# Altium PCB DZ_PCB.PcbDoc
Units mm, origin at the board's own origin, x right, y up, seen from the top; angles counter-clockwise.
Board outline 110 x 50 mm, 2 copper layers (Top Layer, Bottom Layer), stack 2 mm thick; 35 components, 17 nets, 226 pads, 74 vias.
Unrouted connection lines stored in the file: 1.
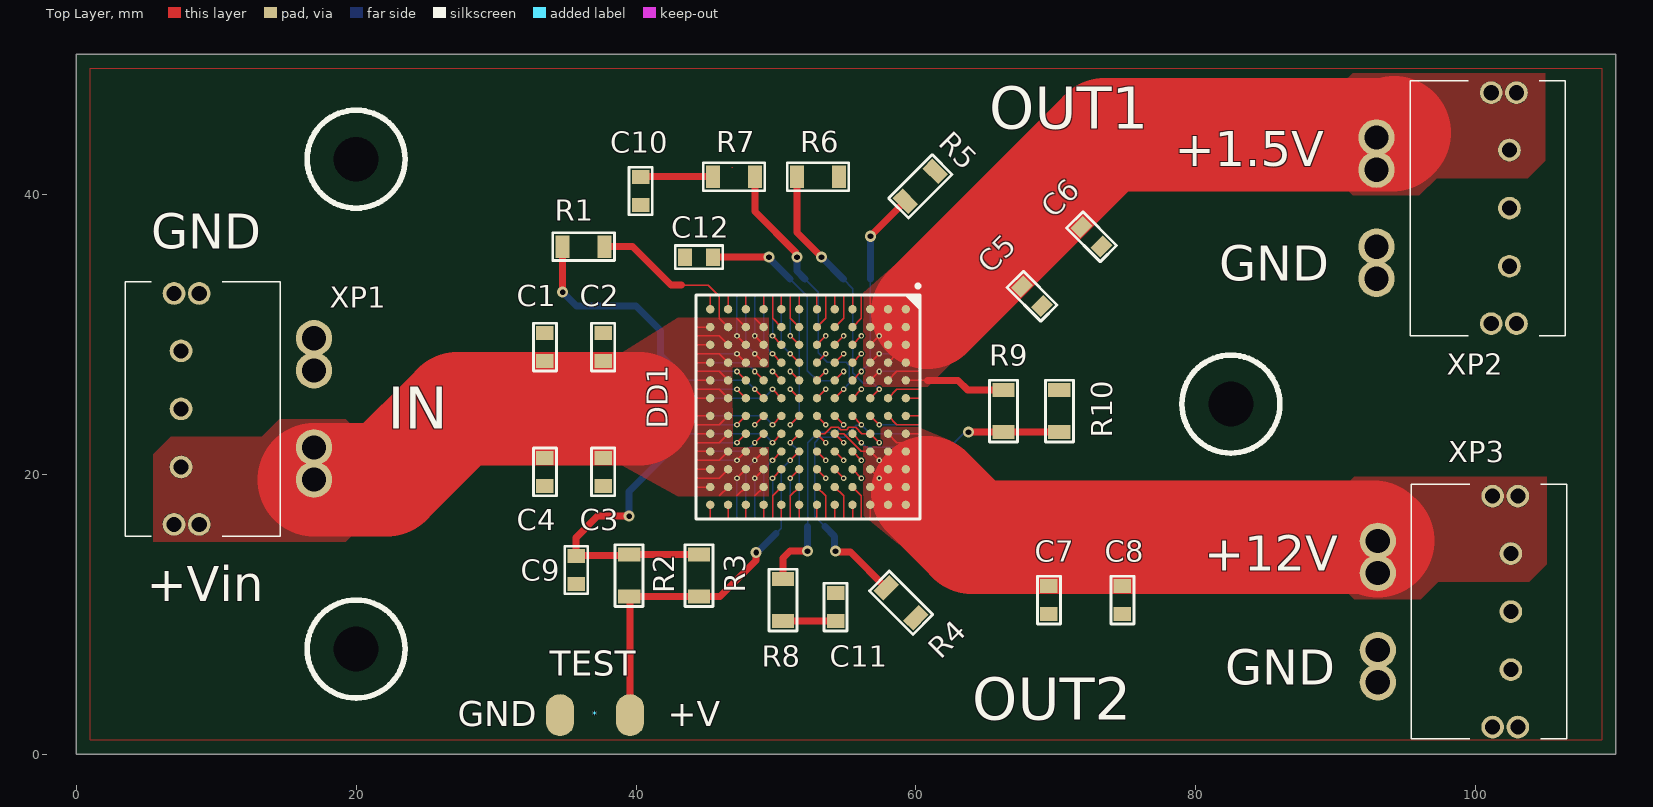
[diagram p0: Top Layer view]
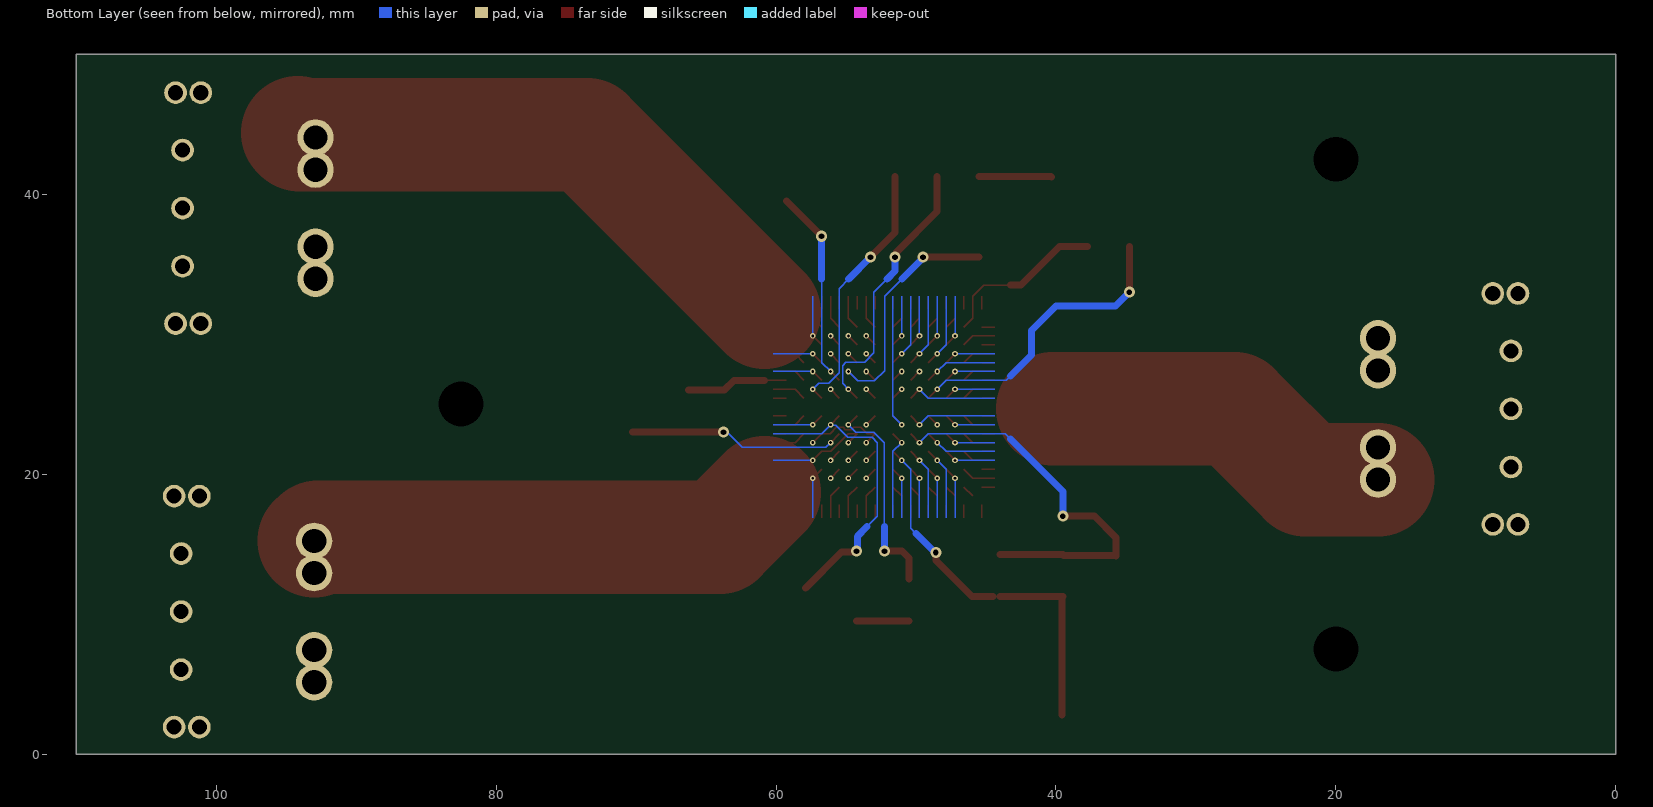
[diagram p1: Bottom Layer view, seen from below]

## Layer stack, top to bottom
Top Solder: solder mask 0.0102, Solder Resist, Dk 3.5
Top Layer: signal copper 0.7
Dielectric 1: dielectric 0.6, FR-4, Dk 4.8
Bottom Layer: signal copper 0.7
Bottom Solder: solder mask 0.0102, Solder Resist, Dk 3.5

## Board outline
0,0 110,0 110,50 0,50

## Design rules (kind name [scope] priority, off if disabled: settings)
Clearance Clearance_BGA_Fanout [WithinRoom('BGA_Fanout')] p1: gap=0.1 ignorepadtopadclearanceinfootprint=FALSE except(0.05: Fill-Fill Fill-Poly Fill-Region Poly-Poly Poly-Region Region-Region)
Clearance [All] p2: gap=0.254 ignorepadtopadclearanceinfootprint=FALSE except(0: Arc-Hole Track-Hole SMDPad-Hole THPad-Hole Via-Hole Fill-Hole Poly-Hole Region-Hole Text-Hole; 0.5: Fill-Fill Fill-Poly Fill-Region Poly-Poly Poly-Region Region-Region)
FanoutControl Fanout_BGA [IsBGA] p1: bgadir=Out bgaviamode=Centered fanoutstyle=BGA fanoutdirection=Alternating viagrid=0.025 // Fanout_BGA (Default Rule)
PolygonConnect [All] p1: connectstyle=Relief reliefconductorwidth=0.254 reliefentries=4 polygonreliefangle="90 Angle" airgapwidth=0
RoomDefinition BGA_Fanout [InComponentClass('Room Definition 1')] p1: confinementstyle=ConfineIn formatcopy=TRUE lockcomponents=FALSE outline 43.761,33.944 60.819,33.944 60.819,16.261 43.761,16.261
RoutingVias RoutingVias_BGA_Fanout [WithinRoom('BGA_Fanout')] p1: holewidth=0.2 width=0.4 viastyle="Through Hole" minholewidth=0.2 minwidth=0.4 maxholewidth=0.2 maxwidth=0.4
RoutingVias [All] p2: holewidth=0.4 width=0.8 viastyle="Through Hole" minholewidth=0.4 minwidth=0.8 maxholewidth=0.4 maxwidth=0.8
SolderMaskExpansion [All] p1: expansion=0.102 istentingtop=FALSE
Width Width_BGA_Fanout [WithinRoom('BGA_Fanout')] p1: maxlimit=0.1 minlimit=0.1 preferedwidth=0.1 minimp=50.000000 maximp=50.000000 favimp=50.000000
Width [All] p2: maxlimit=8.1 minlimit=0.1 preferedwidth=0.5 minimp=50.000000 maximp=50.000000 favimp=50.000000
29 further rules are at their usual default settings.

## Classes and differential pairs
component class DZ_Scheme: * C1 C2 C3 C4 C5 C6 C7 C8 C9 C10 C11 C12 DD1 R1 R2 R3 R4 R5 R6 R7 R8 R9 R10 XP1 XP2 XP3

## Components (designator, comment, footprint, x,y, rotation, side; value= is the part's Value field where it differs from the comment)
* "1982295-1" TEST_ZONE 37.075,2.775 r0 top
C1 "Capasitor" "CAP: 0805" 33.489,29.075 r270 top
C2 "Capasitor" "CAP: 0805" 37.649,29.075 r270 top
C3 "Capasitor" "CAP: 0805" 37.649,20.157 r90 top
C4 "Capasitor" "CAP: 0805" 33.489,20.157 r90 top
C5 "Capasitor" "CAP: 0805" 68.293,32.707 r135 top
C6 "Capasitor" "CAP: 0805" 72.543,36.957 r315 top
C7 "Capasitor" "CAP: 0805" 69.5,11 r90 top
C8 "Capasitor" "CAP: 0805" 74.75,11 r270 top
C9 "Capasitor" "CAP: 0805" 35.725,13.15 r90 top
C10 "Capasitor" "CAP: 0805" 40.325,40.227 r90 top
C11 "Capasitor" "CAP: 0805" 54.25,10.5 r90 top
C12 "Capasitor" "CAP: 0805" 44.5,35.5 r0 top
DD1 "LTM4630-1" BGA144C127P12X12_1600X1600X501 52.29,24.79 r270 top
Designator1 "Comment" "BOASVIEWdrill:Таблица отверстий:0:0:0:0" 50.5,2305.25 r0 top
Designator1 "Comment" "BOASVIEWside:Вид платы сверху:1:0:0:0" 66,2419 r0 top
Designator1 "Comment" "BOASVIEWassboky:Вид сбоку для сборочного чертежа:1:0:0:101" 482,2398.25 r0 top
Designator1 "Comment" "BOASVIEWlayer:Bottom Layer:1:-1:32:1" 66.25,2379.75 r0 top
Designator1 "Comment" "BOASVIEWlayer:Top Layer:1:1:1:1" 66,2447.5 r0 top
Designator1 "Comment" "BOASVIEWlayer:Top Overlay:1:1:33:2" 253,2449.5 r0 top
Designator1 "Comment" "BOASVIEWassembly:Вид сверху для сборочного:1:1:0:101" 480.5,2447.5 r0 top
Designator1 "Comment" "BOASVIEWassembly:Вид снизу для сборочного:1:-1:0:101" 484,2349.25 r0 top
R1 "Resistor" "RES: 1206" 36.25,36.25 r0 top
R2 "Resistor" "RES: 1206" 39.5,12.75 r270 top
R3 "Resistor" "RES: 1206" 44.5,12.75 r270 top
R4 "Resistor" "RES: 1206" 58.939,10.811 r135 top
R5 "Resistor" "RES: 1206" 60.311,40.561 r225 top
R6 "Resistor" "RES: 1206" 53,41.25 r0 top
R7 "Resistor" "RES: 1206" 47,41.25 r180 top
R8 "Resistor" "RES: 1206" 50.5,11 r270 top
R9 "Resistor" "RES: 1206" 66.25,24.5 r270 top
R10 "Resistor" "RES: 1206" 70.25,24.5 r270 top
XP1 "1982295-1" 19822951 7.889,24.657 r90 top
XP2 "1982295-1" 19822951 102,39 r270 top
XP3 "1982295-1" 19822951 102.1,10.176 r270 top

## Footprints (in the part's own frame and the unit in brackets; to place one, negate y for a bottom-side part, rotate by r counter-clockwise, add the part's x,y. Pads: shape width x height; smd on the part's side, far side on the other; paste and mask are expansions set on the pad)
19822951 [mm]
  round 1.62 hole 1.08: 0(0,0.4) 1(-8.25,-0.9) 1(-8.25,0.9) 1(-4.15,0.4) 2(4.15,0.4) 2(8.25,-0.9) 2(8.25,0.9)
  round 2.599 hole 1.733: 1(-5.05,-9.1) 1(-2.75,-9.1) 2(2.75,-9.1) 2(5.05,-9.1)
  silkscreen extent -9.1,-6.7 9.1,4.4, body extent -9.1,-9.53 9.1,4.27, height 7.91
BGA144C127P12X12_1600X1600X501 [mm] "BGA, 144-Leads, Body 16,00x16,00mmx5,01mm, Pitch 1,27mm"
  round 0.6 smd: A1(-6.985,6.985) A2(-5.715,6.985) A3(-4.445,6.985) A4(-3.175,6.985) A5(-1.905,6.985) A6(-0.635,6.985) A7(0.635,6.985) A8(1.905,6.985) A9(3.175,6.985) A10(4.445,6.985) A11(5.715,6.985) A12(6.985,6.985) B1(-6.985,5.715) B2(-5.715,5.715) B3(-4.445,5.715) B4(-3.175,5.715) B5(-1.905,5.715) B6(-0.635,5.715) B7(0.635,5.715) B8(1.905,5.715) B9(3.175,5.715) B10(4.445,5.715) B11(5.715,5.715) B12(6.985,5.715) C1(-6.985,4.445) C2(-5.715,4.445) C3(-4.445,4.445) C4(-3.175,4.445) C5(-1.905,4.445) C6(-0.635,4.445) C7(0.635,4.445) C8(1.905,4.445) C9(3.175,4.445) C10(4.445,4.445) C11(5.715,4.445) C12(6.985,4.445) D1(-6.985,3.175) D2(-5.715,3.175) D3(-4.445,3.175) D4(-3.175,3.175) D5(-1.905,3.175) D6(-0.635,3.175) D7(0.635,3.175) D8(1.905,3.175) D9(3.175,3.175) D10(4.445,3.175) D11(5.715,3.175) D12(6.985,3.175) E1(-6.985,1.905) E2(-5.715,1.905) E3(-4.445,1.905) E4(-3.175,1.905) E5(-1.905,1.905) E6(-0.635,1.905) E7(0.635,1.905) E8(1.905,1.905) E9(3.175,1.905) E10(4.445,1.905) E11(5.715,1.905) E12(6.985,1.905) F1(-6.985,0.635) F2(-5.715,0.635) F3(-4.445,0.635) F4(-3.175,0.635) F5(-1.905,0.635) F6(-0.635,0.635) F7(0.635,0.635) F8(1.905,0.635) F9(3.175,0.635) F10(4.445,0.635) F11(5.715,0.635) F12(6.985,0.635) G1(-6.985,-0.635) G2(-5.715,-0.635) G3(-4.445,-0.635) G4(-3.175,-0.635) G5(-1.905,-0.635) G6(-0.635,-0.635) G7(0.635,-0.635) G8(1.905,-0.635) G9(3.175,-0.635) G10(4.445,-0.635) G11(5.715,-0.635) G12(6.985,-0.635) H1(-6.985,-1.905) H2(-5.715,-1.905) H3(-4.445,-1.905) H4(-3.175,-1.905) H5(-1.905,-1.905) H6(-0.635,-1.905) H7(0.635,-1.905) H8(1.905,-1.905) H9(3.175,-1.905) H10(4.445,-1.905) H11(5.715,-1.905) H12(6.985,-1.905) J1(-6.985,-3.175) J2(-5.715,-3.175) J3(-4.445,-3.175) J4(-3.175,-3.175) J5(-1.905,-3.175) J6(-0.635,-3.175) J7(0.635,-3.175) J8(1.905,-3.175) J9(3.175,-3.175) J10(4.445,-3.175) J11(5.715,-3.175) J12(6.985,-3.175) K1(-6.985,-4.445) K2(-5.715,-4.445) K3(-4.445,-4.445) K4(-3.175,-4.445) K5(-1.905,-4.445) K6(-0.635,-4.445) K7(0.635,-4.445) K8(1.905,-4.445) K9(3.175,-4.445) K10(4.445,-4.445) K11(5.715,-4.445) K12(6.985,-4.445) L1(-6.985,-5.715) L2(-5.715,-5.715) L3(-4.445,-5.715) L4(-3.175,-5.715) L5(-1.905,-5.715) L6(-0.635,-5.715) L7(0.635,-5.715) L8(1.905,-5.715) L9(3.175,-5.715) L10(4.445,-5.715) L11(5.715,-5.715) L12(6.985,-5.715) M1(-6.985,-6.985) M2(-5.715,-6.985) M3(-4.445,-6.985) M4(-3.175,-6.985) M5(-1.905,-6.985) M6(-0.635,-6.985) M7(0.635,-6.985) M8(1.905,-6.985) M9(3.175,-6.985) M10(4.445,-6.985) M11(5.715,-6.985) M12(6.985,-6.985)
  silkscreen extent -8.77,-8 8,8, body extent -8,-8 8,8, height 5.01
"BOASVIEWassboky:Вид сбоку для сборочного чертежа:1:0:0:101" [mm]
"BOASVIEWassembly:Вид сверху для сборочного:1:1:0:101" [mm]
"BOASVIEWassembly:Вид снизу для сборочного:1:-1:0:101" [mm]
"BOASVIEWdrill:Таблица отверстий:0:0:0:0" [mm]
"BOASVIEWlayer:Bottom Layer:1:-1:32:1" [mm]
"BOASVIEWlayer:Top Layer:1:1:1:1" [mm]
"BOASVIEWlayer:Top Overlay:1:1:33:2" [mm]
"BOASVIEWside:Вид платы сверху:1:0:0:0" [mm]
"CAP: 0805" [mm]
  rect 1x1.25 smd: 1(-1,0) 2(1,0)
  silkscreen extent -1.7,-0.82 1.7,0.82, body extent -1,-0.62 1,0.63, height 0.78
"RES: 1206" [mm]
  rect 1x1.6 smd: 1(-1.5,0) 2(1.5,0)
  silkscreen extent -2.2,-1 2.2,1, body extent -1.65,-0.8 1.55,0.8, height 0.47
TEST_ZONE [mm]
  oval 2x3 smd: 1(2.5,0) 2(-2.5,0)

## Part data
*: library part TEST_PINS, Manufacturer_Name="TE Connectivity", Mouser Part Number=571-1982295-1, Arrow Part Number=1982295-1, Arrow Price/Stock=https://www.arrow.com/en/products/1982295-1/te-connectivity, Datasheet Link=https://www.te.com/commerce/DocumentDelivery/DDEController?Action=srchrtrv&DocNm=1-1773894-6_ELCON_Mini_QRG_EN&DocType=Data+Sheet&DocLang=English&PartCntxt=1982295-1&DocFormat=pdf, Height=8mm, Manufacturer_Part_Number=1982295-1, Mouser Price/Stock=https://www.mouser.co.uk/ProductDetail/TE-Connectivity/1982295-1?qs=TL6PIybY3BPz%2FGEsZ%2FgbXA%3D%3D
XP1 XP2 XP3: "Connector", Manufacturer_Name="TE Connectivity", Mouser Part Number=571-1982295-1, Arrow Part Number=1982295-1, Arrow Price/Stock=https://www.arrow.com/en/products/1982295-1/te-connectivity, Datasheet Link=https://www.te.com/commerce/DocumentDelivery/DDEController?Action=srchrtrv&DocNm=1-1773894-6_ELCON_Mini_QRG_EN&DocType=Data+Sheet&DocLang=English&PartCntxt=1982295-1&DocFormat=pdf, Height=8mm, Manufacturer_Part_Number=1982295-1, Mouser Price/Stock=https://www.mouser.co.uk/ProductDetail/TE-Connectivity/1982295-1?qs=TL6PIybY3BPz%2FGEsZ%2FgbXA%3D%3D
C1 C2 C3 C4: Parameter 1=22мкФ
C5 C7: Parameter 1=100мкФ
C6 C8: Parameter 1=470мкФ
C9: Parameter 1=4.7мкФ
C10 C11: Parameter 1=2200пкФ
C12: Parameter 1=0.1мкФ
R1: Parameter 1=100К
R2 R3: Parameter 1=10K
R4 R9 R10: Parameter 1=60K4
R5 R7 R8: Parameter 1=40K2
R6: Parameter 1=121K

## Free pads (board coordinates)
  round 1 hole 3.2 unplated: $K(20,7.5) $K(20,42.5) $K(82.5,25)

## Via types
v1: diameter 0.4, hole 0.2, Top Layer to Bottom Layer, 64 vias
v2: diameter 0.8, hole 0.4, Top Layer to Bottom Layer, 10 vias

## Nets (pads, with @x,y where several pads share a name; then routed paths per layer and width w, separated by ;. In a path a pad name is that pad's centre, name@x,y a point inside that pad or via, vN(x,y) a via of type N, cw(c..) or ccw(c..) an arc to the next point about the centre after c; other vN are vias at no path point)
GND: *.2 C1.1 C2.1 C3.1 C4.1 C5.1 C6.2 C7.1 C8.2 C9.1 C10.1 C11.2 C12.1 DD1.A6 DD1.A7 DD1.B6 DD1.B7 DD1.C7 DD1.D1 DD1.D2 DD1.D3 DD1.D4 DD1.D6 DD1.D9 DD1.D10 DD1.D11 DD1.D12 DD1.E1 DD1.E2 DD1.E3 DD1.E4 DD1.E9 DD1.E10 DD1.E11 DD1.E12 DD1.F1 DD1.F2 DD1.F3 DD1.F4 DD1.F6 DD1.F7 DD1.F10 DD1.F11 DD1.F12 DD1.G1 DD1.G3 DD1.G4 DD1.G6 DD1.G7 DD1.G10 DD1.G12 DD1.H1 DD1.H2 DD1.H3 DD1.H4 DD1.H5 DD1.H6 DD1.H7 DD1.H9 DD1.H10 DD1.H11 DD1.H12 DD1.J1 DD1.J5 DD1.J8 DD1.J12 DD1.K1 DD1.K5 DD1.K6 DD1.K7 DD1.K8 DD1.K12 DD1.L1 DD1.L12 DD1.M1 DD1.M12 R4.1 R5.1 R6.2 R10.1 XP1.2 XP2.2 XP3.2 | length 141.2
  Top Layer w0.1: 45.305,16.87 DD1.M12 ; DD1.M1 45.305,32.71 ; 46.575,16.87 DD1.L12 ; DD1.L1 46.575,32.71 ; v1(47.21,22.25) DD1.K8 ; v1(47.21,23.52) DD1.K7 ; v1(47.21,26.06) DD1.K6 ; v1(47.21,27.33) DD1.K5 ; 47.845,16.87 DD1.K12 ; DD1.K1 47.845,32.71 ; v1(48.48,22.25) DD1.J8 ; v1(48.48,27.33) DD1.J5 ; 49.115,16.87 DD1.J12 ; DD1.J1 49.115,32.71 ; 49.75,16.87 49.75,18.44 DD1.H11 ; v1(49.75,19.71) DD1.H10 ; v1(49.75,20.98) DD1.H9 ; v1(49.75,23.52) DD1.H7 ; v1(49.75,26.06) DD1.H6 ; v1(49.75,27.33) DD1.H5 ; v1(49.75,28.6) DD1.H4 ; v1(49.75,29.87) DD1.H3 ; 49.75,32.71 49.75,31.14 DD1.H2 ; 50.385,16.87 DD1.H12 ; DD1.H1 50.385,32.71 ; v1(51.02,19.71) DD1.G10 ; v1(51.02,23.52) DD1.G7 ; v1(51.02,26.06) DD1.G6 ; v1(51.02,28.6) DD1.G4 ; v1(51.02,29.87) DD1.G3 ; 51.655,16.87 DD1.G12 ; DD1.G1 51.655,32.71 ; 52.925,16.87 DD1.F12 ; DD1.F11 53.56,18.44 53.56,16.87 ; DD1.F10 v1(53.56,19.71) ; DD1.F7 v1(53.56,23.52) ; DD1.F6 v1(53.56,26.06) ; DD1.F4 v1(53.56,28.6) ; DD1.F3 v1(53.56,29.87) ; DD1.F2 53.56,31.14 53.56,32.71 ; DD1.F1 52.925,32.71 ; 54.195,16.87 DD1.E12 ; DD1.E11 54.83,18.44 54.83,16.87 ; DD1.E10 v1(54.83,19.71) ; DD1.E9 v1(54.83,20.98) ; DD1.E4 v1(54.83,28.6) ; DD1.E3 v1(54.83,29.87) ; DD1.E2 54.83,31.14 54.83,32.71 ; DD1.E1 54.195,32.71 ; 55.465,16.87 DD1.D12 ; DD1.D11 56.1,18.44 56.1,16.87 ; DD1.D10 v1(56.1,19.71) ; DD1.D9 v1(56.1,20.98) ; DD1.D6 v1(56.1,26.06) ; DD1.D4 v1(56.1,28.6) ; DD1.D3 v1(56.1,29.87) ; DD1.D2 56.1,31.14 56.1,32.71 ; DD1.D1 55.465,32.71 ; DD1.C7 v1(57.37,23.52) ; DD1.B7 58.64,23.52 60.21,23.52 ; DD1.B6 58.64,26.06 60.21,26.06 ; DD1.A7 60.21,24.155 ; DD1.A6 60.21,25.425
  Bottom Layer w0.1: 44.37,21.615 47.845,21.615 v1(48.48,22.25) ; 44.37,22.25 v1(47.21,22.25) ; 44.37,23.52 v1(47.21,23.52) ; 44.37,24.155 49.115,24.155 v1(49.75,23.52) ; 44.37,25.425 49.115,25.425 v1(49.75,26.06) ; 44.37,26.06 v1(47.21,26.06) ; 44.37,27.33 v1(47.21,27.33) ; 44.37,27.965 47.845,27.965 v1(48.48,27.33) ; 49.115,16.87 49.115,20.345 v1(49.75,20.98) ; 49.115,32.71 49.115,29.235 v1(49.75,28.6) ; 49.75,16.87 v1(49.75,19.71) ; v1(49.75,29.87) 49.75,32.71 ; 50.385,32.71 50.385,29.235 v1(51.02,28.6) ; 51.02,16.87 v1(51.02,19.71) ; v1(51.02,23.52) 51.655,24.155 51.655,32.71 ; v1(51.02,29.87) 51.02,32.71 ; v1(57.37,23.52) 60.21,23.52
INTVcc: C9.2 DD1.H8 R2.1 R3.1 | length 28.9
  Top Layer w0.1: v1(49.75,22.25) DD1.H8
  Top Layer w0.5: v2(39.5,17) 37.25,17 35.725,15.475 C9.2 35.775,14.2 39.45,14.2 R2.1 R3.1@44,14.25
  Bottom Layer w0.1: 43.25,22.5 43.635,22.885 49.115,22.885 v1(49.75,22.25)
  Bottom Layer w0.5: v2(39.5,17) 39.5,18.75 43.25,22.5
NetC10_2: C10.2 R7.2 | length 5.2
  Top Layer w0.5: C10.2 40.348,41.25 R7.2
NetC11_1: C11.1 R8.2 | length 3.8
  Top Layer w0.5: R8.2 C11.1
NetC12_2: C12.2 DD1.E5 | length 17.3
  Top Layer w0.1: DD1.E5 v1(54.83,27.33)
  Top Layer w0.5: C12.2 v2(49.5,35.5)
  Bottom Layer w0.1: 50.99,33.944 52.242,32.692 52.242,27.387 52.964,26.665 54.165,26.665 v1(54.83,27.33)
  Bottom Layer w0.5: v2(49.5,35.5) 49.5,35.434 50.99,33.944
NetDD1_C6: DD1.C6 R6.1 | length 18.9
  Top Layer w0.1: DD1.C6 v1(57.37,26.06)
  Top Layer w0.5: R6.1 51.5,37.25 v2(53.25,35.5)
  Bottom Layer w0.1: 54.806,33.944 55.496,33.254 55.496,27.254 56.25,26.5 56.93,26.5 v1(57.37,26.06)
  Bottom Layer w0.5: v2(53.25,35.5) 54.806,33.944
NetDD1_C8: DD1.C8 DD1.F8 | length 6.1
  Top Layer w0.1: v1(53.56,22.25) DD1.F8 53.496,22.885 53.946,23.335 54.447,23.335 54.612,23.17 55.049,23.17 55.214,23.335 55.682,23.335 56.132,22.885 DD1.C8 v1(57.37,22.25)
NetDD1_D5: DD1.D5 R5.2 | length 14.4
  Top Layer w0.1: DD1.D5 v1(56.1,27.33)
  Top Layer w0.5: v2(56.75,37) R5.2
  Bottom Layer w0.1: v1(56.1,27.33) 56.735,27.965 56.735,33.944
  Bottom Layer w0.5: 56.735,33.944 56.735,36.985 v2(56.75,37)
NetDD1_D7: DD1.D7 R4.2 | length 22.2
  Top Layer w0.1: DD1.D7 v1(56.1,23.52)
  Top Layer w0.5: v2(54.25,14.5) 54.307,14.443 55.307,14.443 R4.2
  Bottom Layer w0.1: 53.489,16.261 52.75,17 52.75,22.25 53.125,22.625 54.875,22.625 55.75,23.5 56.08,23.5 v1(56.1,23.52) 56.735,22.885 60.21,22.885
  Bottom Layer w0.5: 53.489,16.261 54.193,15.557 54.193,14.557 v2(54.25,14.5)
NetDD1_D8: DD1.D8 R9.2 R10.2 | length 15.7
  Top Layer w0.1: DD1.D8 v1(56.1,22.25)
  Top Layer w0.5: v2(63.75,23) R9.2 70.243,23 70.247,22.997 R10.2
  Bottom Layer w0.1: v1(56.1,22.25) 56.45,21.9 62.4,21.9 63.5,23 v2(63.75,23)
NetDD1_E6: DD1.E6 R7.1 | length 19.8
  Top Layer w0.1: DD1.E6 v1(54.83,26.06)
  Top Layer w0.5: R7.1 48.5,38.75 51.443,35.807 51.443,35.557 v2(51.5,35.5)
  Bottom Layer w0.1: 52.056,33.944 53,33 53,28.665 53.665,28 55,28 55.25,27.75 55.25,26.48 v1(54.83,26.06)
  Bottom Layer w0.5: v2(51.5,35.5) 51.5,34.5 52.056,33.944
NetDD1_E7: DD1.E7 R8.1 | length 15.2
  Top Layer w0.1: DD1.E7 v1(54.83,23.52)
  Top Layer w0.5: R8.1 50.5,14 51,14.5 v2(52.25,14.5)
  Bottom Layer w0.1: 52.25,16.261 52.25,22.25 53,23 54.31,23 v1(54.83,23.52)
  Bottom Layer w0.5: v2(52.25,14.5) 52.25,16.261
PGOOD: *.1 DD1.G8 DD1.G9 R2.2 R3.2 | length 33.6
  Top Layer w0.1: v1(51.02,20.98) DD1.G9 ; v1(51.02,22.25) DD1.G8
  Top Layer w0.5: *.1 39.575,11.175 R2.2 R3.2@44,11.25 ; R3.2 46,11.25 48.575,13.825 v2(48.575,14.4)
  Bottom Layer w0.1: 50,15.75 50.385,16.135 50.385,20.345 v1(51.02,20.98) ; v1(51.02,22.25) 51.655,21.615 51.655,16.87
  Bottom Layer w0.5: v2@48.75,14.5 50,15.75
TEMP: DD1.J6 R1.1 | length 21.8
  Top Layer w0.1: v1(48.48,26.06) DD1.J6
  Top Layer w0.5: v2(34.75,33) R1.1
  Bottom Layer w0.1: 43.25,27 43.555,26.695 47.845,26.695 v1(48.48,26.06)
  Bottom Layer w0.5: v2(34.75,33) 35.75,32 40,32 41.75,30.25 41.75,28.5 43.25,27
Vin: C1.2 C2.2 C3.2 C4.2 DD1.J2 DD1.J3 DD1.J4 DD1.J9 DD1.J10 DD1.J11 DD1.K2 DD1.K3 DD1.K4 DD1.K9 DD1.K10 DD1.K11 DD1.L2 DD1.L3 DD1.L4 DD1.L5 DD1.L6 DD1.L7 DD1.L8 DD1.L9 DD1.L10 DD1.L11 DD1.M2 DD1.M3 DD1.M4 DD1.M5 DD1.M6 DD1.M7 DD1.M8 DD1.M9 DD1.M10 DD1.M11 R1.2 XP1.1 | length 104
  Top Layer w0.1: 43.25,33.5 45.15,33.5 45.94,32.71 45.94,31.14 DD1.L2 ; 44.37,19.075 DD1.M11 ; 44.37,19.71 45.94,19.71 DD1.L10 ; 44.37,20.345 DD1.M10 ; 44.37,20.98 45.94,20.98 DD1.L9 ; 44.37,21.615 DD1.M9 ; 44.37,22.25 45.94,22.25 DD1.L8 ; 44.37,22.885 DD1.M8 ; 44.37,23.52 45.94,23.52 DD1.L7 ; 44.37,24.155 DD1.M7 ; 44.37,25.425 DD1.M6 ; 44.37,26.06 45.94,26.06 DD1.L6 ; 44.37,26.695 DD1.M5 ; 44.37,27.33 45.94,27.33 DD1.L5 ; 44.37,27.965 DD1.M4 ; 44.37,28.6 45.94,28.6 DD1.L4 ; 44.37,29.235 DD1.M3 ; 44.37,29.87 45.94,29.87 DD1.L3 ; 44.37,30.505 DD1.M2 ; 45.94,18.44 DD1.L11 ; 47.21,18.44 DD1.K11 ; v1(47.21,19.71) DD1.K10 ; v1(47.21,20.98) DD1.K9 ; v1(47.21,28.6) DD1.K4 ; v1(47.21,29.87) DD1.K3 ; 47.21,31.14 DD1.K2 ; 48.48,18.44 DD1.J11 ; v1(48.48,19.71) DD1.J10 ; v1(48.48,20.98) DD1.J9 ; v1(48.48,28.6) DD1.J4 ; v1(48.48,29.87) DD1.J3 ; 48.48,31.14 DD1.J2
  Top Layer w0.5: R1.2 39.75,36.25 42.5,33.5 43.25,33.5
  Top Layer w8.1: XP1.1@16.989,19.607 22.189,19.607 27.239,24.657 33.489,24.657 37.649,24.657 40.239,24.657
  Bottom Layer w0.1: 44.37,20.98 v1(47.21,20.98) ; 44.37,28.6 v1(47.21,28.6) ; 47.21,16.87 v1(47.21,19.71) ; v1(47.21,29.87) 47.21,32.71 ; 47.845,16.87 47.845,20.345 v1(48.48,20.98) ; 47.845,32.71 47.845,29.235 v1(48.48,28.6) ; 48.48,16.87 v1(48.48,19.71) ; v1(48.48,29.87) 48.48,32.71
Vout1: C5.2 C6.1 DD1.A1 DD1.A2 DD1.A3 DD1.A4 DD1.A5 DD1.B1 DD1.B2 DD1.B3 DD1.B4 DD1.B5 DD1.C1 DD1.C2 DD1.C3 DD1.C4 DD1.C5 R9.1 XP2.1 | length 73.7
  Top Layer w0.1: DD1.C5 v1(57.37,27.33) ; DD1.C4 v1(57.37,28.6) ; DD1.C3 v1(57.37,29.87) ; DD1.C2 57.37,31.14 57.37,32.71 ; DD1.C1 56.735,32.71 ; DD1.B5 58.64,27.33 60.21,27.33 ; DD1.B4 58.64,28.6 60.21,28.6 ; DD1.B3 58.64,29.87 60.21,29.87 ; DD1.B2 58.64,31.14 58.64,32.71 ; DD1.B1 58.005,32.71 ; DD1.A5 60.819,26.695 ; DD1.A4 60.21,27.965 ; DD1.A3 60.21,29.235 ; 60.5,31.25 60.819,31.569
  Top Layer w0.5: 60.819,26.695 63.002,26.695 63.697,26 R9.1
  Top Layer w8.1: 60.819,31.569 73.5,44.25 94.027,44.25 94.166,44.389
  Bottom Layer w0.1: v1(57.37,27.33) 60.21,27.33 ; v1(57.37,28.6) 60.21,28.6 ; v1(57.37,29.87) 57.37,32.71
Vout2: C7.2 C8.1 DD1.A8 DD1.A9 DD1.A10 DD1.A11 DD1.A12 DD1.B8 DD1.B9 DD1.B10 DD1.B11 DD1.B12 DD1.C9 DD1.C10 DD1.C11 DD1.C12 DD1.E8 XP3.1 | length 49.8
  Top Layer w0.1: v1(54.83,22.25) DD1.E8 54.829,22.885 55.649,22.065 55.651,22.065 56.101,21.615 DD1.C9 v1(57.37,20.98) ; 56.735,16.87 DD1.C12 ; DD1.C10 v1(57.37,19.71) ; DD1.B8 58.64,22.25 60.21,22.25 ; DD1.A8 60.21,22.885 ; 60.5,19 60.819,18.681
  Top Layer w8.1: 60.819,18.681 64,15.5 69.5,15.5 74.75,15.5 92.726,15.5 XP3.1@93,15.226
  Bottom Layer w0.1: 57.37,16.87 v1(57.37,19.71) ; v1(57.37,20.98) 60.21,20.98
pads on no net: DD1.F5 DD1.F9 DD1.G2 DD1.G5 DD1.G11 DD1.J7 XP1.0 XP2.0 XP3.0
copper on no net: | length 8.5
  Top Layer w0.1: v1(48.48,23.52) 49.115,24.155 ; 51.02,16.87 51.02,18.44 51.655,19.075 ; v1(51.02,27.33) 51.655,26.695 ; 51.02,32.71 51.02,31.14 51.655,30.505 ; 52.925,21.615 v1(53.56,20.98) ; 52.925,26.695 v1(53.56,27.33)

## Polygon pours and split planes (outlines as drawn)
GND on Top Layer "NONET_L01_P021" (solid, shelved, pour order 21): 1,49 109,49 109,1 1,1
Vout2 on Top Layer "VOUT2_L01_P018" (solid, pour order 18): 105.074,13.545 103.824,12.295 97.324,12.295 96.074,11.045 91.31,11.045 86.834,15.521 91.31,19.795 105.074,19.795
Vout1 on Top Layer "VOUT1_L01_P017" (solid, pour order 17): 104.967,42.405 103.717,41.155 97.217,41.155 95.967,39.905 91.203,39.905 86.727,44.381 91.203,48.655 104.967,48.655
Vout2 on Top Layer "Top Layer-Vout2" (solid, pour order 16): 62.5,22.37 62.5,22.391 60.214,23.345 57.5,23.392 57.5,22 56.25,22 56.25,17.026 58.756,15 62.5,15
Vout1 on Top Layer "VOUT1_L01_P012" (solid, pour order 12): 60.849,26.25 62.5,27.901 62.5,35 58.549,35 56.25,32.956 56.25,26.25
Vin on Top Layer "VIN_L01_P008" (solid, pour order 8): 42.989,31.157 38.989,28.657 37.943,24.999 38.989,20.62 42.989,18.407 49.489,18.407 49.489,21.907 46.899,21.907 46.888,27.558 46.978,27.628 47.014,27.628 49.461,27.628 49.495,27.662 49.489,31.157
Vin on Top Layer "VIN_L01_P007" (solid, pour order 7): 5.489,21.407 6.739,22.657 13.239,22.657 14.489,23.907 19.253,23.907 23.729,19.431 19.253,15.157 5.489,15.157
Vout1 on Top Layer "VOUT1_L01_P015" (solid, pour order 15): 62.5,43.25
no net on Top Layer "NONET_L01_P009" (solid, pour order 9): 46.889,41.905 46.888,41.906
no net on Top Layer "NONET_L01_P006" (solid, pour order 6): 48.5,88
no net on Top Layer "NONET_L01_P002" (solid, pour order 2): 76.75,32.5
no net on Top Layer "NONET_L01_P000" (solid, pour order 0): 63,19

## Silkscreen, mask and mechanical layers (free items; w line width, h text height)
Top Overlay:
  circle w0.4: c82.5,25 r3.5
  circle w0.4: c20,42.5 r3.5
  circle w0.4: c20,7.5 r3.5
  text "OUT1" at 65.228,44.661 h3
  text "+1.5V" at 78.476,42.012 h2.5
  text "GND" at 5.35,36.1 h2.5
  text "GND" at 81.673,33.814 h2.5
  text "IN" at 22.25,23.25 h3
  text "+12V" at 80.6,13.1 h2.5
  text "+Vin" at 5.036,10.924 h2.5
  text "TEST" at 33.825,5.6 h1.8
  text "GND" at 82.094,4.945 h2.5
  text "OUT2" at 64.033,2.44 h3
  text "GND" at 27.25,2 h1.8
  text "+V" at 42.25,2 h1.8
Mechanical 7:
  lines w0.2: 3.484,33.734 3.484,15.594 3.509,15.569 14.593,15.569 14.597,15.572 14.597,33.739 14.585,33.75 3.5,33.75 ; 32.691,18.428 32.691,21.829 34.329,21.829 ; 32.69,27.358 32.69,30.759 34.329,30.759 ; 32.7,18.419 34.338,18.419 ; 32.699,27.349 34.338,27.349 ; 34.347,18.428 34.347,21.811 ; 34.347,27.358 34.347,30.741 ; 34.926,11.301 34.926,14.702 36.564,14.702 ; 34.935,11.292 36.573,11.292 ; 36.552,14.819 36.552,11.435 36.544,11.427 34.905,11.427 34.896,11.435 34.896,14.836 ; 36.582,11.301 36.582,14.684 ; 36.837,27.344 36.837,30.745 38.475,30.745 ; 36.846,27.335 38.484,27.335 ; 36.855,18.452 36.855,21.852 38.494,21.852 ; 36.864,18.443 38.503,18.443 ; 38.493,27.344 38.493,30.727 ; 38.511,18.452 38.511,21.835 ; 39.492,38.536 39.492,41.936 41.13,41.936 ; 39.501,38.527 41.139,38.527 ; 41.148,38.536 41.148,41.919 ; 42.798,36.314 42.798,34.676 46.199,34.676 ; 42.816,36.332 46.199,36.332 ; 44.312,32.802 60.251,32.802 ; 44.314,32.746 44.314,16.807 44.322,16.8 60.283,16.8 60.276,16.807 60.276,32.777 ; 46.208,34.685 46.208,36.323 ; 53.418,8.816 53.418,12.199 ; 53.427,12.208 55.065,12.208 ; 53.436,8.798 55.074,8.798 55.074,12.199 ; 56.684,11.656 56.684,11.676 58.073,13.065 58.087,13.065 61.194,9.959 61.187,9.959 59.801,8.573 59.781,8.573 56.701,11.653 ; 58.089,39.694 59.477,38.305 ; 58.089,39.708 61.195,42.815 ; 59.501,38.322 62.581,41.402 ; 61.195,42.808 62.581,41.422 ; 68.668,9.316 68.668,12.699 ; 68.677,12.708 70.315,12.708 ; 68.686,9.298 70.324,9.298 70.324,12.699 ; 68.881,30.949 68.914,30.949 70.053,32.087 70.066,32.087 67.675,34.478 67.668,34.478 66.523,33.333 66.523,33.32 68.887,30.955 ; 70.766,37.549 73.13,35.185 ; 70.766,37.563 71.911,38.708 ; 71.918,38.708 74.309,36.316 ; 73.157,35.178 74.295,36.316 ; 73.918,9.316 73.918,12.699 ; 73.927,12.708 75.565,12.708 ; 73.936,9.298 75.574,9.298 75.574,12.699 ; 95.293,29.918 95.293,48.085 ; 95.296,48.088 106.381,48.088 ; 95.304,29.907 106.389,29.907 ; 95.393,1.094 95.393,19.26 ; 95.397,19.264 106.481,19.264 ; 95.404,1.083 106.49,1.083 ; 106.406,29.923 106.406,48.063 ; 106.506,1.099 106.506,19.239 ; 34.896,14.836 36.535,14.836 34.896,14.836 ; 60.276,32.777 60.276,32.777 ; 34,35.25 38.5,35.25 38.5,37.25 34,37.25 34,35.25 ; 38.5,10.5 40.5,10.5 40.5,15 38.5,15 38.5,10.5 ; 43.491,10.472 43.491,14.972 45.491,14.972 45.491,10.472 43.491,10.472 ; 44.75,40.25 49.25,40.25 49.25,42.25 44.75,42.25 44.75,40.25 ; 49.5,8.75 49.5,13.25 51.5,13.25 51.5,8.75 49.5,8.75 ; 50.75,40.25 55.25,40.25 55.25,42.25 50.75,42.25 50.75,40.25 ; 65.25,22.25 65.25,26.75 67.25,26.75 67.25,22.25 65.25,22.25 ; 69.25,22.25 69.25,26.75 71.25,26.75 71.25,22.25 69.25,22.25
  lines w0.6: 482,2398.25 482,2391.25 487.5,2391.25 487.5,2398.25
  text "BOASFORMAT|А3|1|0|883070867|165354330|1000000000|1:1|" at 0,2540 h0
  text "BOASFORMAT|А3|101|165354330|883070867|330708660|1000000000|1:1|" at 420,2540 h0
  text "DimLitera|213385827|980019685|-4330708|-12500000|1|||12||0|0|False" at 553,2521 h0
  text "DimLitera|208267717|979921260|787402|-11614173|1|||12||0|0|False" at 527,2518.5 h0
  text "DimLitera|210531496|979921260|-1181102|-11417323|1|||11||0|0|False" at 537.75,2518 h0
  text "DimLitera|212204724|973917323|-9547245|-14370079|1|||8||0|0|False" at 563.25,2510.25 h0
  text "DimV|0|-19685040|70078740|986811024|5610236|-8562993|1||||js12|False|False|False|False" at 175.5,2509.75 h0
  text "DimH|-43307086|0|70078740|986811024|-22244094|3051181|1||||js12|False|False|False|False" at 175.5,2509.75 h0
  text "DimLitera|206200787|977657480|1673228|-10137796|1|||3||0|0|False" at 519.5,2509 h0
  text "DimLitera|215748031|976771654|-10826772|-11023622|1|||7||0|0|False" at 575.5,2509 h0
  text "DimLitera|204133858|974704724|16732283|-12992126|1|||6||0|0|False" at 476,2508.75 h0
  text "DimLitera|202854331|977952756|9251969|-9744094|1|||9||0|0|False" at 491.75,2508.75 h0
  text "DimLitera|205019685|979822835|5314961|-7874015|1|||2||0|0|False" at 507.25,2508.75 h0
  text "DimLitera|218110236|977854331|-13582677|-9842519|1|||4||0|0|False" at 588.5,2508.75 h0
  text "DimLitera|202263780|975000000|16338583|-9153543|1|||6||0|0|False" at 472.25,2499.75 h0
  text "DimLitera|230413386|976771654|-4724409|-6791338|1|||14||0|0|False" at 597.25,2498.25 h0
  text "DimLitera|191043307|972637795|4822835|-5413386|1|||14||0|0|False" at 473,2484.25 h0
  text "DimLitera|215354331|973622047|-20866141|-3051181|1|||13||0|0|False" at 600,2480.75 h0
  text "DimLitera|192618110|964468504|8464567|-5610236|1|||1||0|0|False" at 467.75,2464 h0
  text "DimLitera|217027559|972637795|-19586614|6102362|1|||13||0|0|False" at 601,2455 h0
  text "DimLitera|230314961|966732283|-5511811|5610236|1|||14||0|0|False" at 599,2441.25 h0
  text "DimLitera|202263780|971161417|15748032|12795275|1|||6||0|0|False" at 473.75,2434.25 h0
  text "DimLitera|203149606|968405512|4625984|11220473|1|||5||0|0|False" at 504.25,2431.25 h0
  text "DimLitera|218799213|967421260|-16043307|10925197|1|||4||0|0|False" at 596.5,2429.5 h0
  text "DimLitera|210433071|967224409|-2657480|10826771|1|||2||0|0|False" at 541.25,2429.25 h0
  text "DimLitera|216633858|967421260|-11614173|11318898|1|||7||0|0|False" at 579.75,2428.5 h0
  text "DimLitera|203937008|971062992|13287402|16338583|1|||6||0|0|False" at 484.25,2425 h0
  text "DimLitera|204822835|968011811|5314961|14960630|1|||10||0|0|False" at 506.75,2420.75 h0
  text "DimLitera|206692913|968208661|196850|15354330|1|||10||0|0|False" at 524.5,2420.25 h0
  text "DimLitera|209055118|967322835|-590551|14468504|1|||12||0|0|False" at 532.5,2420.25 h0
  text "DimLitera|212893701|967519685|-9251968|14763779|1|||13||0|0|False" at 564.25,2420 h0
  text "DimV|0|-3543308|188385827|951377953|-5314961|-1377953|1||||js12|False|False|False|False" at 482,2400.25 h0
  text "DimV|0|-13779528|34153543|932874016|-17618110|-1968504|1||||js12|False|False|False|False" at 85.75,2384.5 h0
  text "DimV|0|-9842520|58562992|936909449|17322835|-4822835|1||||js12|False|False|False|False" at 148.75,2379.75 h0
  text "DimH|-24606300|-6889764|58759843|925984252|-11515749|-14566929|1||||js12|False|False|False|False" at 148.25,2367 h0
  text "DimD|198425199|921948818|-6496061|-8070867|629921|1|3 отв.|||js12|False|False|False|False" at 520.5,2362.25 h0
  text "DimH|-10826772|0|69389764|927066929|-984252|-14566929|1||||js12|False|False|False|False" at 176.25,2354.75 h0
  text "DimV|0|-9842520|223031496|924901575|15059055|-4625984|1||||js12|False|False|False|False" at 566.5,2349.25 h0
  text "DimV|0|-19685040|233858268|924901575|12204724|-7480315|1||||js12|False|False|False|False" at 594,2349.25 h0
  text "DimV|0|-13779528|198425197|921948819|-13681103|-6102362|1||||js12|False|False|False|False" at 504,2341.75 h0
  text "DimH|-7874016|0|198425197|921948819|-4232284|7972441|1||||js12|False|False|False|False" at 504,2341.75 h0
  text "DimH|-7874016|0|33956693|920177165|-3543307|-7677165|1||||js12|False|False|False|False" at 86.25,2337.25 h0
  text "DimV|0|-2952756|33956693|920177165|-17618110|-1574803|1||||js12|False|False|False|False" at 86.25,2337.25 h0
  text "DimH|-10826772|0|233858268|915059055|-5708662|15748032|1||||js12|False|False|False|False" at 594,2324.25 h0
  text "DimV|0|-2952756|198425197|908169291|-13681103|-1574803|1||||js12|False|False|False|False" at 504,2306.75 h0
  text "DimH|-43307087|0|231889764|916830709|-22637795|-5413386|1||||js12|False|False|False|False" at 594,2299.25 h0
  text "SET|63|64|65|67|68|69|0,18|0,6|0,18|0,6|0,6|True|1|1,25|5|2|False|True|True|False|2,2|50|4|100|Rz 160|False|False|71|71|True|True|False|1|GlavkonGOST Type A|True|5|3.5|False|12|5|2" at 0,0.025 h0
  text "STAMP|Материал1|FR4 - 2 2мм" at 0,0 h0
  text "TT0013#8 Покрытие контактных площадок и металлизированных отверстий Хим. Мм Гор. ПОС-63, ГОСТ 21930-76." at 0,0 h0
  text "TT0012#" at 0,0 h0
  text "TT0011#7 Маркировать защитной маской PMR-6000 W30/CA-40 G30, цвет белый, фирма «TAIYO INK». Попадание маркировочной краски на паяемые поверхности не допускается. Допускаются разрывы в маркировочных знаках, не искажающие восприятие информации." at 0,0 h0
  text "TT0010#" at 0,0 h0
  text "TT0009#6 Расстояние между печатными проводниками и контактными площадками не менее 0,2 мм." at 0,0 h0
  text "TT0008#" at 0,0 h0
  text "TT0007#5 Ширина печатных проводников не менее (0,255±0,05) мм." at 0,0 h0
  text "TT0006#" at 0,0 h0
  text "TT0005#4 Шаг координатной сетки 2 мм" at 0,0 h0
  text "TT0004#" at 0,0 h0
  text "TT0003#3 Печатная плата должна соответствовать ГОСТ Р 53429-2009, группе жесткости 3 при верхнем значении температуры окружающей среды (85±2) °С." at 0,0 h0
  text "TT0002#" at 0,0 h0
  text "TT0001#2 Класс точности 3 по ГОСТ Р 53429-2009." at 0,0 h0
  text "TT0000#1 *  Размер для справок." at 0,0 h0
  text "2TT0006#  5 Установку элементов выполнять по ГОСТ 29137-91  и схеме электрической принципиальной АРВЦ.467879.001 ПЭ3" at 0,0 h0
  text "2TT0005#4 Припой ПОС-61 ГОСТ 21931-76" at 0,0 h0
  text "2TT0004#" at 0,0 h0
  text "2TT0003#3 Печатные проводники не показаны." at 0,0 h0
  text "2TT0002#" at 0,0 h0
  text "2TT0001#2 Маркировать краской БМ, белой, ГОСТ 28196-89." at 0,0 h0
  text "2TT0000#1 Маркировка элементов показана условно." at 0,0 h0
  text "2STAMP|Обозначение|АРВЦ.671355.010 СБ" at 0,0 h0
  text "2STAMP|Организация|УрФУ" at 0,0 h0
  text "2STAMP|Наименование1|Стабилизатор напряжения" at 0,0 h0
  text "2STAMP|Наименование2|Чертеж сборочный" at 0,0 h0
  text "2STAMP|Разработал|Сидоренко" at 0,0 h0
  text "2STAMP|Проверил|Кудинов" at 0,0 h0
  text "STAMP|Обозначение|АРВЦ.758723.010" at 0,0 h0
  text "STAMP|Организация|УрФУ" at 0,0 h0
  text "STAMP|Наименование1|Плата печатная" at 0,0 h0
  text "STAMP|Масса|2 г" at 0,0 h0
  text "STAMP|Разработал|Сидоренко" at 0,0 h0
  text "STAMP|Проверил|Кудинов" at 0,0 h0
  text "BOASVIADRILLTABLE:none,78740,64|triangle,157480,10" at 0,0 h0
  text "2BOASDRILLTABLE:circle0110,425197,есть,21,True|circle1001,682283,есть,12,True|circle1010,1259843,нет,3,True" at 0,0 h0
Mechanical 8:
  drawing of 68 lines, arcs and shapes, not listed
Mechanical 9:
  drawing of 170 lines, arcs and shapes, not listed
  text "12" at 555.5,2523.53 h7.68
  text "12" at 520.377,2521.03 h7.68
  text "11" at 540.25,2520.53 h7.68
  text "8" at 565.75,2512.78 h7.68
  text "3" at 514.213,2511.53 h7.68
  text "7" at 578,2511.53 h7.68
  text "6" at 470.87,2511.28 h7.68
  text "9" at 486.612,2511.28 h7.68
  text "2" at 501.529,2511.28 h7.68
  text "4" at 591,2511.28 h7.68
  text "110h14" at 118.025,2507.78 h7.68
  text "6" at 467.12,2502.28 h7.68
  text "14" at 599.75,2500.78 h7.68
  text "14" at 467.159,2486.78 h7.68
  text "13" at 602.5,2483.28 h7.68
  text "50h14" at 187.72,2469.674 h7.68 r90
  text "1" at 463.601,2466.53 h7.68
  text "13" at 603.5,2457.53 h7.68
  text "14" at 601.5,2443.78 h7.68
  text "6" at 468.62,2436.78 h7.68
  text "5" at 498.593,2433.78 h7.68
  text "4" at 599,2432.03 h7.68
  text "2" at 543.75,2431.78 h7.68
  text "7" at 582.25,2431.03 h7.68
  text "6" at 479.12,2427.53 h7.68
  text "10" at 500.105,2423.28 h7.68
  text "10" at 517.855,2422.78 h7.68
  text "12" at 535,2422.78 h7.68
  text "13" at 566.75,2422.53 h7.68
  text "9*" at 465.97,2394.431 h7.68 r90
  text "27,5±0,1" at 575.512,2366.78 h7.68
  text "3 отв." at 525.16,2364.78 h7.68
  text "3,2h14" at 539.309,2364.78 h7.68
  text "20±0,1" at 491.025,2364.53 h7.68
  text "25±0,1" at 190.22,2364.317 h7.68 r90
  text "35±0,1" at 38.97,2351.967 h7.68 r90
  text "25±0,1" at 602.22,2333.817 h7.68 r90
  text "35±0,1" at 466.72,2321.467 h7.68 r90
  text "50*" at 622.47,2321.424 h7.68 r90
  text "20±0,1" at 73.275,2320.28 h7.68
  text "62,5±0,1" at 112.872,2320.28 h7.68
  text "27,5±0,1" at 157.762,2320.28 h7.68
  text "7,5±0,1" at 38.97,2318.005 h7.68 r90
  text "110*" at 536.025,2288.03 h7.68
  text "7,5±0,1" at 466.72,2287.505 h7.68 r90
Mechanical 13:
  lines w0.18: 230,2253 295,2253 ; 230,2258 295,2258 ; 230,2263 295,2263 ; 230,2268 295,2268 ; 230,2273 295,2273 ; 230,2288 295,2288 ; 230,2293 295,2293 ; 230,2298 295,2298 ; 369.96,2268 369.96,2283 ; 374.98,2268 374.98,2283 ; 391.7,2522.1 394.8,2516.7 400.4,2526.5 ; 650,2253 715,2253 ; 650,2258 715,2258 ; 650,2263 715,2263 ; 650,2268 715,2268 ; 650,2273 715,2273 ; 650,2288 715,2288 ; 650,2293 715,2293 ; 650,2298 715,2298 ; 789.96,2268 789.96,2283 ; 794.98,2268 794.98,2283 ; 420,2243 420,2540 ; 420,2243 840,2243 840,2540 420,2540 ; 420,2243 0,2243 0,2540 420,2540 ; 420,2243 420,2540
  lines w0.6: 8,2273 20,2273 ; 8,2308 20,2308 ; 8,2333 20,2333 ; 8,2358 20,2358 ; 8,2475 20,2475 ; 13,2248 13,2393 ; 13,2415 13,2535 ; 20,2393 8,2393 8,2248 20,2248 ; 20,2415 8,2415 8,2535 20,2535 ; 20,2521 90,2521 90,2535 ; 230,2248 230,2303 415,2303 ; 230,2278 295,2278 ; 230,2283 295,2283 ; 237,2278 237,2303 ; 247,2248 247,2303 ; 270,2248 270,2303 ; 285,2248 285,2303 ; 295,2248 295,2303 415,2303 ; 295,2263 365,2263 415,2263 ; 295,2288 415,2288 ; 344,2524 349,2515 356.6,2529 ; 356.7,2529 407,2529 ; 365,2248 365,2288 ; 365,2268 415,2268 ; 365,2283 380,2283 415,2283 ; 380,2268 380,2288 ; 385.57,2263 385.57,2268 ; 397,2268 397,2288 ; 415,2311 415,2303 ; 428,2273 440,2273 ; 428,2308 440,2308 ; 428,2333 440,2333 ; 428,2358 440,2358 ; 428,2475 440,2475 ; 433,2248 433,2393 ; 433,2415 433,2535 ; 440,2393 428,2393 428,2248 440,2248 ; 440,2415 428,2415 428,2535 440,2535 ; 440,2521 510,2521 510,2535 ; 650,2248 650,2303 835,2303 ; 650,2278 715,2278 ; 650,2283 715,2283 ; 657,2278 657,2303 ; 667,2248 667,2303 ; 690,2248 690,2303 ; 705,2248 705,2303 ; 715,2248 715,2303 835,2303 ; 715,2263 785,2263 835,2263 ; 715,2288 835,2288 ; 785,2248 785,2288 ; 785,2268 835,2268 ; 785,2283 800,2283 835,2283 ; 800,2268 800,2288 ; 805.57,2263 805.57,2268 ; 817,2268 817,2288 ; 835,2311 835,2303 ; 20,2248 415,2248 415,2535 20,2535 ; 20,2248 20,2535 ; 440,2248 835,2248 835,2535 440,2535 ; 440,2248 440,2535
  text "АРВЦ.758723.010" at 80.672,2530.951 h10.75 r180
  text "АРВЦ.671355.010 СБ" at 504.604,2530.951 h10.75 r180
  text "Rz 160" at 356.7,2516.7 h10.75
  text "(" at 388,2516.7 h10.75
  text ")" at 399,2516.7 h10.75
  text "Перв. примен." at 11.975,2494.382 h5.38 r90
  text "Перв. примен." at 431.975,2494.382 h5.38 r90
  text "Справ. №" at 11.975,2437.783 h5.38 r90
  text "Справ. №" at 431.975,2437.783 h5.38 r90
  text "Подп. и дата" at 11.975,2365.969 h5.38 r90
  text "Подп. и дата" at 431.975,2365.969 h5.38 r90
  text "Инв. № дубл." at 11.975,2336.461 h5.38 r90
  text "Инв. № дубл." at 431.975,2336.461 h5.38 r90
  text "1 *Размер для справок. / 2 Класс точности 3 по ГОСТ Р 53429-2009.  / 3 Печатная плата должна соответствовать ГОСТ Р 53429-2009, группе жесткости 3 при верхнем значении температуры окружающей среды (85±2) °С. / 4 Шаг координатной сетки 2 мм / 5 Ширина печатных проводников не менее (0,255±0,05) мм. / 6 Расстояние между печатными проводниками и контактными площадками не менее 0,2 мм." at 230.25,2323.5 h7.68
  text "Взам. инв. №" at 11.975,2311.506 h5.38 r90
  text "Взам. инв. №" at 431.975,2311.506 h5.38 r90
  text "1 *Размеры для справок  / 2 Маркировка элементов показана условно.  / 3 Маркировать краской БМ, белой, ГОСТ 28196-89. / 4 Печатные проводники не показаны.  / 5 Припой ПОС-61 ГОСТ 21931-76 / 6 Установку элементов выполнять по ГОСТ 29137-91  и схеме электрической принципиальной АРВЦ.467879.001 ПЭ3" at 650.25,2308.5 h7.68
  text "7 Маркировать защитной маской PMR-6000 W30/CA-40 G30, цвет белый, фирма «TAIYO INK». Попадание маркировочной краски на паяемые поверхности не допускается. Допускаются разрывы в маркировочных знаках, не искажающие восприятие информации. / 8 Покрытие контактных площадок и металлизированных отверстий Хим. Мм Гор. ПОС-63, ГОСТ 21930-76." at 230.25,2303.75 h7.68
  text "АРВЦ.758723.010" at 329.328,2292.549 h10.75
  text "АРВЦ.671355.010 СБ" at 745.396,2292.549 h10.75
  text "Лит." at 369.328,2284.025 h5.38
  text "Масса" at 384.11,2284.025 h5.38
  text "Масштаб" at 399.137,2284.025 h5.38
  text "Лит." at 789.328,2284.025 h5.38
  text "Масса" at 804.11,2284.025 h5.38
  text "Масштаб" at 819.137,2284.025 h5.38
  text "Подп. и дата" at 11.975,2282.469 h5.38 r90
  text "Подп. и дата" at 431.975,2282.469 h5.38 r90
  text "Изм." at 230.686,2279.025 h5.38
  text "Лист" at 238.024,2279.025 h5.38
  text "№ докум." at 252.271,2279.025 h5.38
  text "Подп." at 273.922,2279.025 h5.38
  text "Дата" at 285.965,2279.025 h5.38
  text "Изм." at 650.686,2279.025 h5.38
  text "Лист" at 658.024,2279.025 h5.38
  text "№ докум." at 672.271,2279.025 h5.38
  text "Подп." at 693.922,2279.025 h5.38
  text "Дата" at 705.965,2279.025 h5.38
  text "Стабилизатор напряжения" at 715.498,2276.249 h9.29
  text "Плата печатная" at 305.274,2275.849 h10.75
  text "Разраб." at 230.533,2273.771 h5.38
  text "Сидоренко" at 247.68,2273.771 h5.38
  text "Разраб." at 650.533,2273.771 h5.38
  text "Сидоренко" at 667.68,2273.771 h5.38
  text "2 г" at 385.045,2273.392 h7.68
  text "1:1" at 403.821,2273.392 h7.68
  text "1:1" at 823.821,2273.392 h7.68
  text "Пров." at 230.533,2268.771 h5.38
  text "Кудинов" at 247.68,2268.771 h5.38
  text "Пров." at 650.533,2268.771 h5.38
  text "Кудинов" at 667.68,2268.771 h5.38
  text "Т.контр." at 230.533,2263.771 h5.38
  text "Лист" at 366.442,2263.771 h5.38
  text "Листов" at 387.485,2263.771 h5.38
  text "1" at 407.423,2263.771 h5.38
  text "Т.контр." at 650.533,2263.771 h5.38
  text "Лист" at 786.442,2263.771 h5.38
  text "Листов" at 807.485,2263.771 h5.38
  text "1" at 827.423,2263.771 h5.38
  text "Чертеж сборочный" at 730.317,2259.892 h7.68
  text "FR4 - 2 2мм" at 319.524,2256.814 h6.14
  text "Н.контр." at 230.533,2253.771 h5.38
  text "Н.контр." at 650.533,2253.771 h5.38
  text "УрФУ" at 381.29,2252.549 h10.75
  text "УрФУ" at 801.29,2252.549 h10.75
  text "Инв. № подл." at 11.975,2251.461 h5.38 r90
  text "Инв. № подл." at 431.975,2251.461 h5.38 r90
  text "Утв." at 230.533,2248.771 h5.38
  text "Утв." at 650.533,2248.771 h5.38
  text "Копировал" at 305.533,2243.771 h5.38
  text "Формат" at 375.533,2243.771 h5.38
  text "А3" at 396.967,2243.771 h5.38
  text "Копировал" at 725.533,2243.771 h5.38
  text "Формат" at 795.533,2243.771 h5.38
  text "А3" at 816.967,2243.771 h5.38

## Text inside footprints (layer, text, board x,y; h text height)
Designator1: Mechanical 7 "85" at 169.678,2383.45 h7.68; Mechanical 7 "80" at 163.385,2383.45 h7.68; Mechanical 7 "75" at 157.519,2383.45 h7.68; Mechanical 7 "70" at 151.226,2383.45 h7.68; Mechanical 7 "65" at 144.678,2383.45 h7.68; Mechanical 7 "60" at 138.385,2383.45 h7.68; Mechanical 7 "55" at 132.217,2383.45 h7.68; Mechanical 7 "50" at 125.924,2383.45 h7.68; Mechanical 7 "45" at 119.72,2383.45 h7.68; Mechanical 7 "40" at 113.428,2383.45 h7.68; Mechanical 7 "35" at 107.217,2383.45 h7.68; Mechanical 7 "30" at 100.924,2383.45 h7.68; Mechanical 7 "25" at 94.567,2383.45 h7.68; Mechanical 7 "20" at 88.275,2383.45 h7.68; Mechanical 7 "15" at 82.97,2383.45 h7.68; Mechanical 7 "10" at 76.678,2383.45 h7.68; Mechanical 7 "5" at 70.922,2383.45 h7.68; Mechanical 7 "0" at 64.739,2383.45 h7.68; Mechanical 7 "40" at 56.605,2327.642 h7.68; Mechanical 7 "35" at 56.683,2333.892 h7.68; Mechanical 7 "30" at 56.598,2340.142 h7.68; Mechanical 7 "25" at 56.385,2346.392 h7.68; Mechanical 7 "20" at 56.299,2352.642 h7.68; Mechanical 7 "15" at 58.191,2358.892 h7.68; Mechanical 7 "10" at 58.105,2365.142 h7.68; Mechanical 7 "5" at 59.093,2371.392 h7.68; Mechanical 7 "0" at 59.228,2377.642 h7.68
Designator1: Mechanical 7 "85" at 169.428,2441 h7.68; Mechanical 7 "80" at 163.135,2441 h7.68; Mechanical 7 "75" at 157.269,2441 h7.68; Mechanical 7 "70" at 150.976,2441 h7.68; Mechanical 7 "65" at 144.428,2441 h7.68; Mechanical 7 "60" at 138.135,2441 h7.68; Mechanical 7 "55" at 131.967,2441 h7.68; Mechanical 7 "50" at 125.674,2441 h7.68; Mechanical 7 "45" at 119.47,2441 h7.68; Mechanical 7 "40" at 113.178,2441 h7.68; Mechanical 7 "35" at 106.967,2441 h7.68; Mechanical 7 "30" at 100.674,2441 h7.68; Mechanical 7 "25" at 94.317,2441 h7.68; Mechanical 7 "20" at 88.025,2441 h7.68; Mechanical 7 "15" at 82.72,2441 h7.68; Mechanical 7 "10" at 76.428,2441 h7.68; Mechanical 7 "5" at 70.672,2441 h7.68; Mechanical 7 "0" at 64.489,2441 h7.68; Mechanical 7 "40" at 56.355,2495.392 h7.68; Mechanical 7 "35" at 56.433,2489.142 h7.68; Mechanical 7 "30" at 56.348,2482.892 h7.68; Mechanical 7 "25" at 56.135,2476.642 h7.68; Mechanical 7 "20" at 56.049,2470.392 h7.68; Mechanical 7 "15" at 57.941,2464.142 h7.68; Mechanical 7 "10" at 57.855,2457.892 h7.68; Mechanical 7 "5" at 58.843,2451.642 h7.68; Mechanical 7 "0" at 58.978,2445.392 h7.68
Designator1: Mechanical 7 "А" at 305.305,2515.22 h15.36; Mechanical 7 "Слой маркировки" at 282.997,2503.5 h10.72; Mechanical 12 "OUT1" at 318.228,2494.161 h3; Mechanical 12 "OUT2" at 317.033,2451.94 h3; Mechanical 12 "TEST" at 286.825,2455.1 h1.8; Mechanical 12 "GND" at 258.35,2485.6 h2.5; Mechanical 12 "+Vin" at 258.036,2460.424 h2.5; Mechanical 12 "+1.5V" at 331.476,2491.512 h2.5; Mechanical 12 "GND" at 334.673,2483.314 h2.5; Mechanical 12 "R10" at 327.012,2472.096 h1.52 r90; Mechanical 12 "DD1" at 295.262,2472.723 h1.52 r90; Mechanical 12 "C1" at 284.484,2481.488 h1.52; Mechanical 12 "IN" at 275.25,2472.75 h3; Mechanical 12 "C4" at 284.48,2465.488 h1.52; Mechanical 12 "XP2" at 350.938,2476.581 h1.52; Mechanical 12 "XP3" at 351.043,2470.335 h1.52; Mechanical 12 "+12V" at 333.6,2462.6 h2.5; Mechanical 12 "C8" at 326.48,2463.238 h1.52; Mechanical 12 "GND" at 335.094,2454.445 h2.5; Mechanical 12 "C10" at 291.171,2492.466 h1.52; Mechanical 12 "C5" at 318.292,2483.728 h1.52 r45; Mechanical 12 "R9" at 318.23,2477.238 h1.52; Mechanical 12 "R2" at 295.712,2460.98 h1.52 r90; Mechanical 12 "R8" at 301.98,2455.738 h1.52; Mechanical 12 "C9" at 284.755,2461.888 h1.52; Mechanical 12 "R5" at 314.526,2493.071 h1.52 r315; Mechanical 12 "R4" at 314.77,2456.185 h1.52 r45; Mechanical 12 "C2" at 288.98,2481.488 h1.52; Mechanical 12 "C3" at 288.98,2465.488 h1.52; Mechanical 12 "XP1" at 271.106,2481.401 h1.52; Mechanical 12 "C6" at 322.852,2487.706 h1.52 r45; Mechanical 12 "C7" at 321.48,2463.238 h1.52; Mechanical 12 "R6" at 304.745,2492.488 h1.52; Mechanical 12 "C11" at 306.85,2455.738 h1.52; Mechanical 12 "R7" at 298.73,2492.488 h1.52; Mechanical 12 "C12" at 295.5,2486.388 h1.52; Mechanical 12 "R3" at 300.812,2461.03 h1.52 r90; Mechanical 12 "+V" at 295.25,2451.5 h1.8; Mechanical 12 "R1" at 287.208,2487.611 h1.52; Mechanical 12 "GND" at 280.25,2451.5 h1.8
Designator1: Mechanical 7 "DD1" at 531.752,2472.053 h2; Mechanical 7 "C1" at 513.372,2476.026 h2; Mechanical 7 "C4" at 513.387,2467.108 h2; Mechanical 7 "C2" at 517.444,2476.026 h2; Mechanical 7 "C3" at 517.5,2467.108 h2; Mechanical 7 "XP1" at 490.312,2471.608 h2; Mechanical 7 "C5" at 548.097,2479.658 h2; Mechanical 7 "C6" at 552.386,2483.908 h2; Mechanical 7 "C7" at 549.264,2457.951 h2; Mechanical 7 "C8" at 554.562,2457.951 h2; Mechanical 7 "C9" at 515.518,2460.101 h2; Mechanical 7 "C10" at 519.882,2487.178 h2; Mechanical 7 "C11" at 533.897,2457.451 h2; Mechanical 7 "C12" at 524.06,2482.451 h2; Mechanical 7 "R1" at 516.065,2483.201 h2; Mechanical 7 "R2" at 519.228,2459.701 h2; Mechanical 7 "R3" at 524.284,2459.701 h2; Mechanical 7 "R4" at 538.769,2457.762 h2; Mechanical 7 "R5" at 540.047,2487.512 h2; Mechanical 7 "R6" at 532.776,2488.201 h2; Mechanical 7 "R7" at 526.696,2488.201 h2; Mechanical 7 "R8" at 530.245,2457.951 h2; Mechanical 7 "R9" at 545.975,2471.451 h2; Mechanical 7 "R10" at 549.74,2471.451 h2; Mechanical 7 "XP2" at 578.335,2485.951 h2; Mechanical 7 "XP3" at 578.492,2457.127 h2; Mechanical 7 "*" at 517.376,2449.726 h2
Designator1: Mechanical 12 "нет" at 141.33,2250.838 h7.68; Mechanical 12 "3,2" at 104.233,2250.838 h7.68; Mechanical 12 "3" at 173.107,2250.838 h7.68; Mechanical 12 "есть" at 140.449,2259.84 h7.68; Mechanical 12 "1,7" at 104.866,2259.84 h7.68; Mechanical 12 "12" at 172.438,2259.84 h7.68; Mechanical 12 "есть" at 140.449,2268.142 h7.68; Mechanical 12 "1,1" at 105.321,2268.142 h7.68; Mechanical 12 "21" at 171.87,2268.142 h7.68; Mechanical 12 "переходное" at 60.85,2276.142 h7.68; Mechanical 12 "есть" at 140.449,2276.142 h7.68; Mechanical 12 "0,4" at 104.585,2276.142 h7.68; Mechanical 12 "10" at 172.428,2276.142 h7.68; Mechanical 12 "переходное" at 60.85,2284.142 h7.68; Mechanical 12 "есть" at 140.449,2284.142 h7.68; Mechanical 12 "0,2" at 104.194,2284.142 h7.68; Mechanical 12 "64" at 172.037,2284.142 h7.68; Mechanical 12 "отв." at 170.341,2291.892 h7.68; Mechanical 12 "Кол." at 170.551,2299.392 h7.68; Mechanical 12 "металлизации" at 130.176,2291.892 h7.68; Mechanical 12 "Наличие" at 136.816,2299.392 h7.68; Mechanical 12 "мм" at 104.61,2291.892 h7.68; Mechanical 12 "Диаметр отв.," at 92.659,2299.392 h7.68; Mechanical 12 "отв." at 65.341,2291.892 h7.68; Mechanical 12 "Обозначение" at 56.195,2299.392 h7.68
Designator1: Mechanical 12 "2,02*" at 35,2404.895 h7.68 r90; Mechanical 12 "А(2)" at 126.5,2398 h15.36